# Altium PCB CCS_v3.1.PcbDoc
Units mm, origin at the board's own origin, x right, y up, seen from the top; angles counter-clockwise.
Board outline 55.75 x 70.87 mm, 2 copper layers (Top Layer, Bottom Layer); 34 components, 39 nets, 250 pads, 30 vias.
Unrouted connection lines stored in the file: 1.
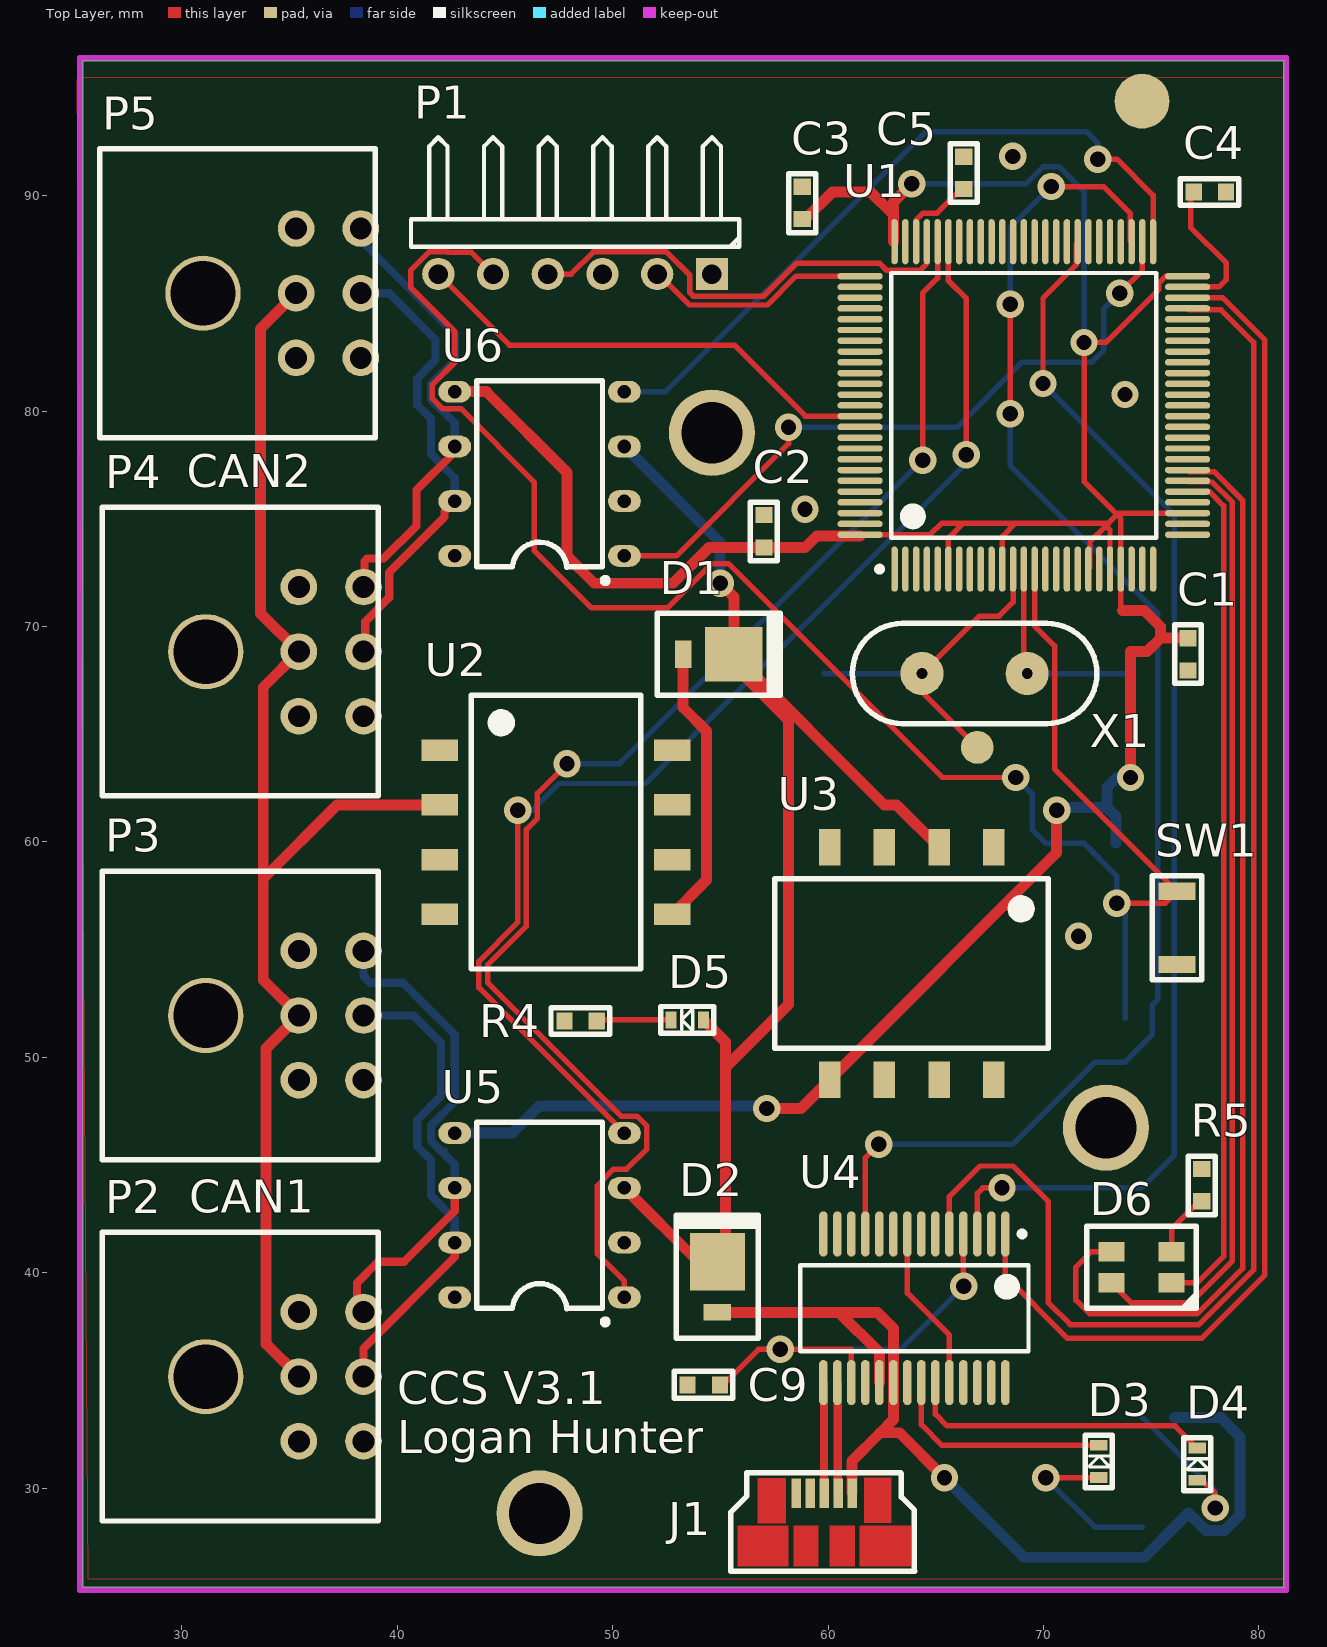
[diagram p0: Top Layer view]
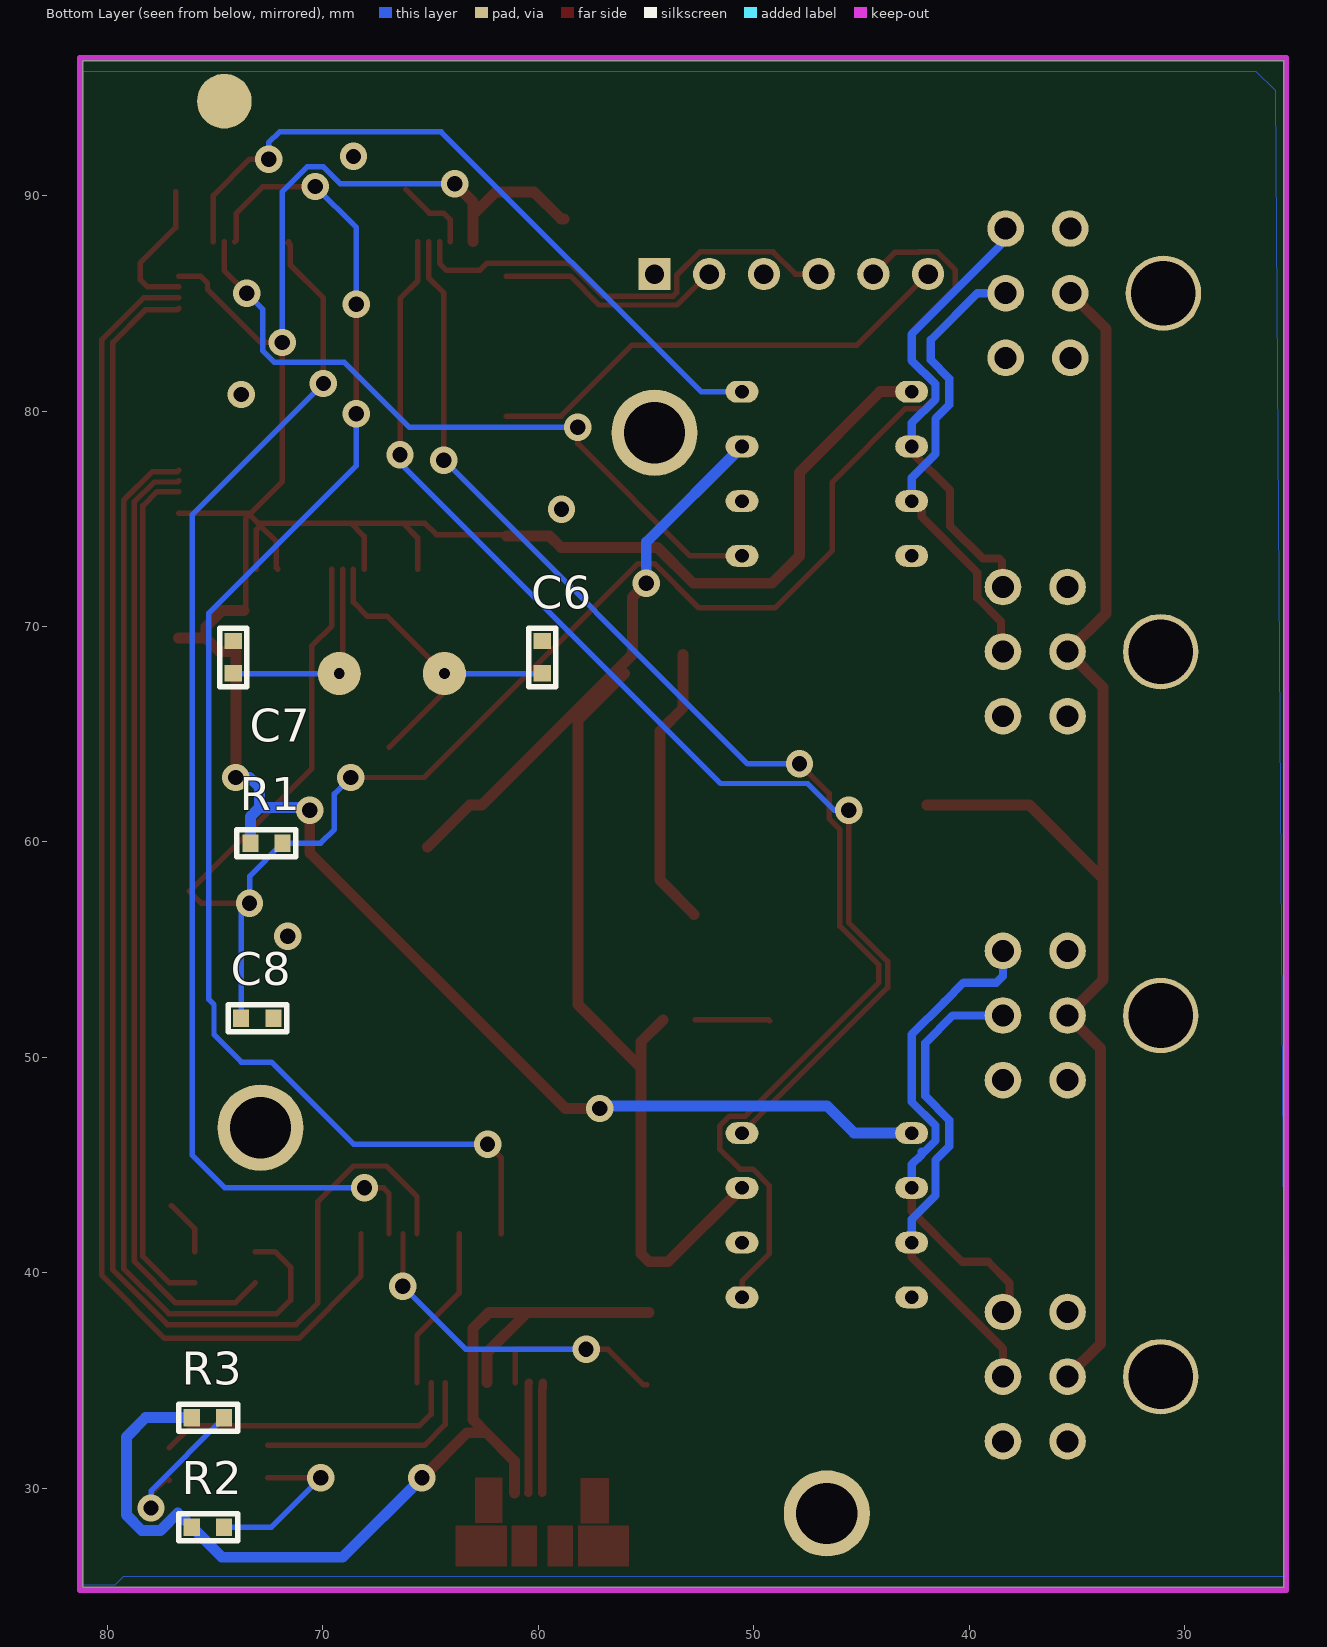
[diagram p1: Bottom Layer view, seen from below]

## Layer stack, top to bottom
Top Solder: solder mask 0.0102, Solder Resist, Dk 3.5
Top Layer: signal copper 0.0356
Dielectric 1: dielectric 0.32, FR-4, Dk 4.8
Bottom Layer: signal copper 0.0356
Bottom Solder: solder mask 0.0102, Solder Resist, Dk 3.5

## Board outline
25.4,25.4 81.153,25.4 81.153,96.266 25.4,96.266

## Design rules (kind name [scope] priority, off if disabled: settings)
BoardOutlineClearance [All] p1: gap=0.381
Clearance [All] p1: gap=0.152
DiffPairsRouting [All] p1: maxlimit=0.254 minlimit=0.254 mostfreqgap=0.254 toplayer_minwidth=0.381 toplayer_maxwidth=0.381 toplayer_prefwidth=0.381 bottomlayer_minwidth=0.381 bottomlayer_maxwidth=0.381 bottomlayer_prefwidth=0.381 maxuncoupledlength=12.7
HoleSize [All] p1: absolutevalues=TRUE maxlimit=2.54 minlimit=0.33 maxpercent=80.000 minpercent=20.000
MinimumAnnularRing [All] p1: minimumring=0.178
PolygonConnect [All] p1: connectstyle=Relief reliefconductorwidth=0.254 reliefentries=4 polygonreliefangle="90 Angle" airgapwidth=0.254
RoutingVias [All] p1: holewidth=0.711 width=1.27 viastyle="Through Hole" minholewidth=0.711 minwidth=1.27 maxholewidth=0.711 maxwidth=1.27
SolderMaskExpansion [All] p1: expansion=0.102
Width [All] p1: maxlimit=0.762 minlimit=0.152 preferedwidth=0.254
28 further rules are at their usual default settings.

## Classes and differential pairs
component class Communications: C9 D3 D4 R2 R3 U4 U5 U6
component class Conectors: J1 P1 P2 P3 P4 P5
component class MCU: C4 C5 C6 C7 C8 D6 R1 R5 SW1 U1 X1
component class Power: C1 C2 C3 D1 D2 D5 R4 U2 U3
differential pair CAN1: +CAN1_P -CAN1_N
differential pair CAN2: +CAN2_P -CAN2_N
differential pair USBD: +USBD_P -USBD_N

## Components (designator, comment, footprint, x,y, rotation, side; value= is the part's Value field where it differs from the comment)
C1 "SCH_GENERIC_CAPACITOR_0603" PCB_GENERIC_SMD_0603 76.708,68.707 r90 top
C2 "SCH_GENERIC_CAPACITOR_0603" PCB_GENERIC_SMD_0603 57.023,74.422 r270 top
C3 "SCH_GENERIC_CAPACITOR_0603" PCB_GENERIC_SMD_0603 58.801,89.662 r270 top
C4 "SCH_GENERIC_CAPACITOR_0603" PCB_GENERIC_SMD_0603 77.724,90.17 r180 top
C5 "SCH_GENERIC_CAPACITOR_0603" PCB_GENERIC_SMD_0603 66.294,91.059 r270 top
C6 "SCH_GENERIC_CAPACITOR_0603" PCB_GENERIC_SMD_0603 59.817,68.58 r270 bottom
C7 "SCH_GENERIC_CAPACITOR_0603" PCB_GENERIC_SMD_0603 74.168,68.58 r270 bottom
C8 "SCH_GENERIC_CAPACITOR_0603" PCB_GENERIC_SMD_0603 73.05,51.816 r180 bottom
C9 "SCH_GENERIC_CAPACITOR_0603" PCB_GENERIC_SMD_0603 54.229,34.798 r180 top
D1 "Schottky Diode" "ON Semi Schottky Diode - MBRM110LT1G" 53.975,68.707 r180 top
D2 "Schottky Diode" "ON Semi Schottky Diode - MBRM110LT1G" 54.864,38.862 r270 top
D3 "Green LED" SMD_0603_LED 72.517,31.242 r90 top
D4 "Blue LED" SMD_0603_LED 77.089,31.115 r90 top
D5 "Red LED" SMD_0603_LED 53.467,51.689 r180 top
D6 "TriColourLED" "TricolourLED - SunLED - DK  1497-1225-2-ND" 74.549,40.259 r0 top
J1 "Molex MicroUSB" "Molex MircoUSB - 0473460001" 59.817,29.083 r90 top
P1 "Debug" HDR1X6H 54.61,86.36 r180 top
P2 "CAN1" PCB_MLX_MICROFIT_3X2 31.115,35.179 r270 top
P3 "CAN1 TERM" PCB_MLX_MICROFIT_3X2 31.115,51.943 r270 top
P4 "CAN2" PCB_MLX_MICROFIT_3X2 31.115,68.834 r270 top
P5 "CAN2 TERM" PCB_MLX_MICROFIT_3X2 30.988,85.471 r270 top
R1 "SCH_GENERIC_RESISTOR_0603" PCB_GENERIC_SMD_0603 72.619,59.944 r0 bottom
R2 "SCH_GENERIC_RESISTOR_0603" PCB_GENERIC_SMD_0603 75.336,28.194 r180 bottom
R3 "SCH_GENERIC_RESISTOR_0603" PCB_GENERIC_SMD_0603 75.336,33.274 r180 bottom
R4 "SCH_GENERIC_RESISTOR_0603" PCB_GENERIC_SMD_0603 48.514,51.689 r180 top
R5 "SCH_GENERIC_RESISTOR_0603" PCB_GENERIC_SMD_0603 77.343,44.069 r270 top
SW1 "Reset Switch" "Push Button Switch" 76.2,56.007 r270 top
U1 "STM32F407VGT6" STM-LQFP100_M 69.088,80.264 r90 top
U2 "Delta SA01S DC/DC 12 to 5" 100milPitchSMD8PinPackage 47.371,60.452 r270 top
U3 "Delta SA01S DC/DC 5 to 3.3" 100milPitchSMD8PinPackage 63.881,54.356 r180 top
U4 "IC_FT232RL" SSOP-28 64.008,38.354 r270 top
U5 "MCP2562" MCP2562 46.609,42.672 r180 top
U6 "MCP2562" MCP2562 46.609,77.089 r180 top
X1 "XTAL" CRYSTAL_8MHZ 66.802,67.818 r0 top

## Footprints (in the part's own frame and the unit in brackets; to place one, negate y for a bottom-side part, rotate by r counter-clockwise, add the part's x,y. Pads: shape width x height; smd on the part's side, far side on the other; paste and mask are expansions set on the pad)
100milPitchSMD8PinPackage [mm]
  rect 1x1.7 smd: 1(-3.81,-5.4) 2(-1.27,-5.4) 3(1.27,-5.4) 4(3.81,-5.4) 5(3.81,5.4) 6(1.27,5.4) 7(-1.27,5.4) 8(-3.81,5.4)
  silkscreen extent -6.35,-3.94 6.35,3.94, body extent -6.22,-3.81 6.22,3.81, height 7.11
CRYSTAL_8MHZ [mm] "631-1100-ND"
  round 2 hole 0.5: 1(-2.44,0) 2(2.44,0)
  silkscreen extent -5.68,-2.32 5.68,2.32, body extent -5.59,-1.85 5.59,1.85, height 3.6
HDR1X6H [mm] "Connector; Header; 6 Position; Right Angle"
  rect 1.5x1.5 hole 0.9: 1(0,0)
  round 1.5 hole 0.9: 2(2.54,0) 3(5.08,0) 4(7.62,0) 5(10.16,0) 6(12.7,0)
  silkscreen extent -1.27,-6.35 13.97,-1.27
MCP2562 [mil]
  oval 60x40 hole 25: 1(-155,150) 2(-155,50) 3(-155,-50) 4(-155,-150) 5(155,-150) 6(155,-50) 7(155,50) 8(155,150)
  silkscreen extent -125,-170 115,200, body extent -115,-170 115,170, height 210
"Molex MircoUSB - 0473460001" [mm]
  rect 1.38x0.45 smd: 1(0.69,-1.3) 2(0.69,-0.65) 3(0.69,0) 4(0.69,0.65) 5(0.69,1.3)
  Top Layer region: -2.72,0.25 -0.82,0.25 -0.82,1.425 -2.72,1.425
  Top Layer region: -2.72,1.65 -0.82,1.65 -0.82,4.025 -2.72,4.025
  Top Layer region: -0.711,1.779 1.389,1.779 1.389,3.101 -0.711,3.101
  Top Layer region: -0.686,-3.125 1.414,-3.125 1.414,-1.854 -0.686,-1.854
  Top Layer region: -2.72,-4.025 -0.82,-4.025 -0.82,-1.65 -2.72,-1.65
  Top Layer region: -2.72,-1.425 -0.82,-1.425 -0.82,-0.25 -2.72,-0.25
  silkscreen extent -2.95,-4.22 1.63,4.34, body extent -4.1,-3.96 1.33,4.02, height 2.72
"ON Semi Schottky Diode - MBRM110LT1G" [mil]
  rect 105x100 smd: 1(-65,0)
  rect 30x50 smd: 2(27.5,0)
  silkscreen extent -150,-75 75,75, body extent -115,-65 0,65, height 40
PCB_GENERIC_SMD_0603 [mm]
  rect 0.75x0.8 smd: 1(-0.75,0) 2(0.75,0)
  silkscreen extent -1.35,-0.63 1.38,0.63, body extent -0.75,-0.5 0.75,0.5, height 0.45
PCB_MLX_MICROFIT_3X2 [mm]
  round 1.7 hole 1.02: 1(3,4.32) 2(0,4.32) 3(-3,4.32) 4(3,7.32) 5(0,7.32) 6(-3,7.32)
  round 3.5 hole 3: ""(0,0)
  silkscreen extent -6.7,-4.8 6.7,8, body extent -6.57,-4.65 6.58,7.59, height 8.83
"Push Button Switch" [mm]
  rect 0.8x1.7 smd: 1(-1.7,0) 2(1.7,0)
  silkscreen extent -2.41,-1.14 2.41,1.14, body extent -2.16,-0.89 2.16,0.89, height 1.6
SMD_0603_LED [mm]
  rect 0.5x0.8 smd: 1(-0.747,-0.047) 2(0.753,-0.047)
  silkscreen extent -1.22,-0.67 1.23,0.58, body extent -0.75,-0.55 0.75,0.45, height 0.45
SSOP-28 [mm] "28-Pin SSOP 0.65 mm Pitch"
  oval 2.1x0.4 smd: 1(-3.45,4.225) 2(-3.45,3.575) 3(-3.45,2.925) 4(-3.45,2.275) 5(-3.45,1.625) 6(-3.45,0.975) 7(-3.45,0.325) 8(-3.45,-0.325) 9(-3.45,-0.975) 10(-3.45,-1.625) 11(-3.45,-2.275) 12(-3.45,-2.925) 13(-3.45,-3.575) 14(-3.45,-4.225) 15(3.45,-4.225) 16(3.45,-3.575) 17(3.45,-2.925) 18(3.45,-2.275) 19(3.45,-1.625) 20(3.45,-0.975) 21(3.45,-0.325) 22(3.45,0.325) 23(3.45,0.975) 24(3.45,1.625) 25(3.45,2.275) 26(3.45,2.925) 27(3.45,3.575) 28(3.45,4.225)
  silkscreen extent -3.57,-5.3 2,5.3, body extent -2.7,-5.3 2.7,5.3, height 2
STM-LQFP100_M [mm] "Thin QFP, 100-Leads, Body 14x14mm, Pitch 0.5mm, IPC Low Density"
  oval 2.1x0.3 smd: 1(-7.6,6) 2(-7.6,5.5) 3(-7.6,5) 4(-7.6,4.5) 5(-7.6,4) 6(-7.6,3.5) 7(-7.6,3) 8(-7.6,2.5) 9(-7.6,2) 10(-7.6,1.5) 11(-7.6,1) 12(-7.6,0.5) 13(-7.6,0) 14(-7.6,-0.5) 15(-7.6,-1) 16(-7.6,-1.5) 17(-7.6,-2) 18(-7.6,-2.5) 19(-7.6,-3) 20(-7.6,-3.5) 21(-7.6,-4) 22(-7.6,-4.5) 23(-7.6,-5) 24(-7.6,-5.5) 25(-7.6,-6) 51(7.6,-6) 52(7.6,-5.5) 53(7.6,-5) 54(7.6,-4.5) 55(7.6,-4) 56(7.6,-3.5) 57(7.6,-3) 58(7.6,-2.5) 59(7.6,-2) 60(7.6,-1.5) 61(7.6,-1) 62(7.6,-0.5) 63(7.6,0) 64(7.6,0.5) 65(7.6,1) 66(7.6,1.5) 67(7.6,2) 68(7.6,2.5) 69(7.6,3) 70(7.6,3.5) 71(7.6,4) 72(7.6,4.5) 73(7.6,5) 74(7.6,5.5) 75(7.6,6)
  oval 0.3x2.1 smd: 26(-6,-7.6) 27(-5.5,-7.6) 28(-5,-7.6) 29(-4.5,-7.6) 30(-4,-7.6) 31(-3.5,-7.6) 32(-3,-7.6) 33(-2.5,-7.6) 34(-2,-7.6) 35(-1.5,-7.6) 36(-1,-7.6) 37(-0.5,-7.6) 38(0,-7.6) 39(0.5,-7.6) 40(1,-7.6) 41(1.5,-7.6) 42(2,-7.6) 43(2.5,-7.6) 44(3,-7.6) 45(3.5,-7.6) 46(4,-7.6) 47(4.5,-7.6) 48(5,-7.6) 49(5.5,-7.6) 50(6,-7.6) 76(6,7.6) 77(5.5,7.6) 78(5,7.6) 79(4.5,7.6) 80(4,7.6) 81(3.5,7.6) 82(3,7.6) 83(2.5,7.6) 84(2,7.6) 85(1.5,7.6) 86(1,7.6) 87(0.5,7.6) 88(0,7.6) 89(-0.5,7.6) 90(-1,7.6) 91(-1.5,7.6) 92(-2,7.6) 93(-2.5,7.6) 94(-3,7.6) 95(-3.5,7.6) 96(-4,7.6) 97(-4.5,7.6) 98(-5,7.6) 99(-5.5,7.6) 100(-6,7.6)
  silkscreen extent -7.72,-6.15 6.15,6.82, body extent -7,-7 7,7, height 1.6
"TricolourLED - SunLED - DK  1497-1225-2-ND" [mm]
  rect 1.2x0.9 smd: 1(1.4,-0.725) 2(-1.4,-0.725) 3(-1.4,0.725) 4(1.4,0.725)
  silkscreen extent -2.54,-1.91 2.54,1.91, body extent -1.84,-1.52 1.84,1.52, height 1.9

## Part data
C1 C2 C3 C4 C5 C6 C7 C8 C9: "Generic SMD capacitor 0603"
D1 D2: library part "ON Semi Schottky Diode - MBRM110LT1G"
D3 D4 D5: library part SMD_0603_LED
J1: library part "Molex MicroUSB -  0473460001"
P1: library part "Header 6H", "Header, 6-Pin, Right Angle"
P2 P3 P4 P5: library part SCH_MLX_MICROFIT_3X2
R1 R2 R3 R4 R5: "Generic SMD resistor 0603"
SW1: library part PushButtonSwitch
U1: "ARM Cortex-M4 32-bit MCU+FPU, 210 DMIPS, 1024 kB Flash, 192 kB Internal RAM, 82 I/Os, 100-pin LQFP, -40 to 85 degC, Tray"
U2 U3: library part "Delta SA01S DC/DC"
U4: "FT232R USB UART"
X1: library part Crystal

## Free pads (board coordinates)
  round 4 hole 2.845: ""(46.609,28.829) ""(54.61,78.994) ""(72.898,46.736)
  round 1.524 smd: ""(66.929,64.389)
  round 2.54 all layers, no hole: ""(74.574,94.386)

## Via types
v1: diameter 1.27, hole 0.711, Top Layer to Bottom Layer, 30 vias

## Nets (pads, with @x,y where several pads share a name; then routed paths per layer and width w, separated by ;. In a path a pad name is that pad's centre, name@x,y a point inside that pad or via, vN(x,y) a via of type N, cw(c..) or ccw(c..) an arc to the next point about the centre after c; other vN are vias at no path point)
3.3V: C1.2 C2.2 C3.2 R1.2 U1.6 U1.11 U1.19 U1.21 U1.22 U1.28 U1.50 U1.75 U1.100 U3.5 U5.5 U6.5 | length 146.9
  Top Layer w0.254: U1.100@61.691,74.264 64.739,74.264 65.278,74.803 66.294,74.803 ; U1.6 65.588,74.097 66.294,74.803 ; U1.11 68.088,74.184 68.707,74.803 ; U1.19 72.159,72.735 72.159,73.937 72.898,74.676 ; U1.21 73.088,74.486 72.898,74.676 ; 73.66,70.739 73.588,70.811 U1.22 73.588,75.021 71.882,76.727 v1(71.882,83.185) 72.898,83.185 75.359,85.646 75.359,85.942 75.681,86.264 U1.50 ; U1.28 73.486,75.264 73.025,74.803 ; 66.294,74.803 68.707,74.803 ; 68.707,74.803 73.025,74.803 ; 72.898,74.676 73.025,74.803
  Top Layer w0.508: U6.5 44.136,80.899 47.879,77.156 47.879,73.279 49.149,72.009 52.808,72.009 54.471,73.672 C2.2 58.94,73.672 59.476,74.208 U1.100@61.488,74.208 ; v1(57.15,47.625) 58.74,47.625 U3.5 70.612,59.497 v1(70.612,61.468) ; C3.2 58.94,88.912 60.198,90.17 61.976,90.17 63.032,89.114 ; U1.75@63.032,87.864 63.032,89.114 ; v1(63.881,90.551) 63.032,89.702 63.032,89.114 ; 73.66,70.739 74.676,70.739 75.426,69.989 75.426,69.457 ; v1(74.041,62.992) 74.041,68.834 74.803,68.834 75.426,69.457 ; C1.2 75.426,69.457
  Bottom Layer w0.254: v1(63.881,90.551) 69.192,90.551 69.979,91.338 70.737,91.338 71.882,90.193 v1(71.882,83.185)
  Bottom Layer w0.508: U5.5 45.339,46.482 46.609,47.752 57.023,47.752 v1(57.15,47.625) ; v1@70.866,61.595 72.951,61.595 ; R1.2 73.369,61.177 72.951,61.595 ; v1(74.041,62.992) 73.406,62.992 72.951,62.537 72.951,61.595
5V: D1.1 D2.1 D5.1 U3.2 U5.3 U6.3 | length 62.9
  Top Layer w0.508: U5.3 53.975,40.513 D2.1 55.245,40.894 55.245,49.53 ; D5.1 55.245,50.705 55.245,49.53 ; v1(54.991,72.009) 55.626,71.374 D1.1 62.611,61.722 63.185,61.722 U3.2 ; D1.1@56.007,67.818 58.166,65.659 58.166,52.451 55.245,49.53
  Bottom Layer w0.508: U6.3 54.991,73.914 v1(54.991,72.009)
"5V - DCDC": D1.2 U2.5 | length 13.2
  Top Layer w0.508: U2.5 54.356,58.227 54.356,65.151 53.276,66.23 D1.2
"5V - USB": D2.2 J1.1 R2.1 R3.1 U4.19 U4.20 | length 48.6
  Top Layer w0.508: D2.2 60.515,38.163 ; J1.1 61.117,31.272 62.42,32.575 ; U4.19 62.383,36.296 60.515,38.163 ; v1(65.405,30.48) 63.309,32.575 62.42,32.575 ; 60.515,38.163 62.293,38.163 63.033,37.424 U4.20 63.033,33.188 62.42,32.575
  Bottom Layer w0.508: v1(65.405,30.48) 69.088,26.797 74.689,26.797 R2.1 76.74,28.848 77.547,28.042 78.409,28.042 79.121,28.753 79.121,32.385 78.232,33.274 R3.1
12V: P2.2 P3.2 P4.2 P5.2 U2.2 | length 64
  Top Layer w0.508: P5.2 33.657,83.82 33.657,70.612 P4.2 33.782,67.181 33.782,58.293 ; P2.2 33.909,36.705 33.909,50.417 P3.2 33.782,53.596 33.782,58.293 ; U2.2 37.211,61.722 33.782,58.293
BLUE_LED: D6.3 U1.32 | length 51.2
  Top Layer w0.254: D6.3 72.226,40.984 71.501,40.259 71.501,38.735 72.136,38.1 77.149,38.1 79.248,40.199 79.248,75.861 77.915,77.193 76.759,77.193 U1.32
CAN1_N: P2.6 P3.6 U5.6 | length 22.7
  Top Layer w0.381: P2.6@38.133,38.768 38.133,39.53 39.116,40.513 40.326,40.513 42.672,42.859 U5.6 ; P2.6 P2.6@38.435,38.435
  Bottom Layer w0.381: P3.6 38.435,53.767 38.735,53.467 40.259,53.467 41.148,52.578 41.157,52.578 42.672,51.063 42.672,47.939 41.567,46.834 41.567,46.13 42.066,45.631 42.202,45.631 42.202,45.495 42.672,45.025 U5.6
CAN1_P: P2.5 P3.5 U5.7 | length 22.7
  Top Layer w0.381: P2.5 38.435,36.492 42.672,40.729 U5.7
  Bottom Layer w0.381: P3.5@38.54,52.048 P3.5 40.767,51.943 42.037,50.673 42.037,48.202 40.932,47.097 40.932,45.867 41.567,45.232 41.567,43.59 42.672,42.485 U5.7
CAN1_RX: U1.70 U5.4 | length 56.7
  Top Layer w0.254: v1(45.593,61.468) 45.593,56.261 43.79,54.458 43.79,53.238 U5.4 ; U1.70 65.588,86.05 66.421,85.217 v1(66.421,77.978)
  Bottom Layer w0.254: v1(45.593,61.468) 46.256,61.468 47.5,62.713 51.537,62.713 66.421,77.597 v1(66.421,77.978)
CAN1_TX: U1.71 U5.1 | length 64.7
  Top Layer w0.254: v1@47.879,63.881 v1(47.879,63.627) 46.507,62.255 46.507,61.089 45.999,60.581 45.999,56.093 44.196,54.289 44.196,53.467 50.394,47.269 51.126,47.269 51.587,46.808 51.587,45.745 50.65,44.808 50.044,44.808 49.276,44.04 49.276,40.894 50.546,39.624 U5.1 ; v1(64.389,77.724) 64.389,85.471 65.088,86.17 U1.71
  Bottom Layer w0.254: v1(47.879,63.627) 50.292,63.627 v1(64.389,77.724)
CAN2_N: P4.6 P5.6 U6.6 | length 21.7
  Top Layer w0.381: P4.6 38.481,71.88 38.481,73.025 38.608,73.152 39.37,73.152 40.894,74.676 40.894,76.327 42.672,78.105 U6.6
  Bottom Layer w0.381: P5.6@38.179,88.471 P5.6 38.308,87.93 42.672,83.566 42.672,82.356 41.567,81.251 41.567,80.547 42.672,79.442 U6.6
CAN2_P: P4.5 P5.5 U6.7 | length 21.7
  Top Layer w0.381: P4.5 38.519,68.918 38.519,70.231 39.628,71.34 39.628,72.512 42.202,75.086 42.202,75.349 U6.7
  Bottom Layer w0.381: P5.5 39.624,85.471 41.783,83.312 41.783,82.365 40.932,81.514 40.932,80.284 41.567,79.649 41.567,78.007 42.672,76.902 U6.7
CAN2_RX: U1.51 U6.4 | length 33.4
  Top Layer w0.254: v1(72.517,91.694) 73.406,91.694 75.088,90.012 U1.51
  Bottom Layer w0.254: U6.4 52.451,80.899 64.516,92.964 72.009,92.964 72.517,92.456 v1(72.517,91.694)
CAN2_TX: U1.52 U6.1 | length 32.4
  Top Layer w0.254: U6.1 52.959,73.279 58.166,78.486 v1(58.166,79.248) ; v1(73.533,85.471) 74.588,86.526 U1.52
  Bottom Layer w0.254: v1(58.166,79.248) 65.989,79.248 69.012,82.271 72.261,82.271 72.796,82.806 72.796,84.734 v1(73.533,85.471)
GND: C1.1 C2.1 C3.1 C4.1 C5.1 C6.1 C7.1 C8.2 C9.2 J1.5 P1.1 P1.3 P2.3 P3.3 P4.3 P5.3 pad.@74.574,94.386 R4.2 R5.1 SW1.2 U1.10 U1.20 U1.27 U1.74 U1.94 U1.99 U2.1 U2.4 U3.1 U3.4 U4.7 U4.18 U4.21 U4.25 U4.26 U5.2 U5.8 U6.2 U6.8
  other v1: 71.628,55.626 58.928,75.438 73.787,80.772 68.58,91.821
GREEN_LED: D6.2 U1.31 | length 44.5
  Top Layer w0.254: D6.2 74.075,38.608 76.835,38.608 78.765,40.538 78.765,75.769 77.826,76.708 76.744,76.708 U1.31
NC: U4.8 U4.24 | length 7.7
  Top Layer w0.254: U4.8 63.683,39.06 65.633,37.11 U4.24
NetC4_2: C4.2 U1.49 | length 6.7
  Top Layer w0.254: U1.49 78.144,85.764 78.486,86.106 78.486,86.868 76.835,88.519 C4.2@76.835,90.182
NetC5_2: C5.2 U1.73 | length 3.7
  Top Layer w0.254: U1.73 64.088,88.871 64.41,89.193 65.063,89.193 C5.2@66.155,90.285
NetC7_2: C7.2 U1.13 X1.2 | length 9.8
  Top Layer w0.254: U1.13 69.088,67.972 X1.2
  Bottom Layer w0.254: X1.2 74.156,67.818 C7.2
NetC9_1: C9.1 U4.4 U4.17 | length 20.5
  Top Layer w0.254: C9.1 55.118,34.798 56.765,36.445 v1(57.785,36.445) 61.083,36.445 U4.17 ; U4.4 66.283,39.381 v1(66.294,39.37)
  Bottom Layer w0.254: v1(57.785,36.445) 63.369,36.445 v1(66.294,39.37)
NetD3_1: D3.1 R2.2 | length 7.9
  Top Layer w0.254: v1(70.104,30.48) 70.119,30.495 D3.1
  Bottom Layer w0.254: v1(70.104,30.48) 72.39,28.194 R2.2
NetD3_2: D3.2 U4.22 | length 10.6
  Top Layer w0.254: U4.22 64.333,32.949 65.287,31.995 D3.2
NetD4_1: D4.1 R3.2 | length 7.5
  Top Layer w0.254: D4.1 77.248,30.48 77.978,29.75 v1(77.978,29.083)
  Bottom Layer w0.254: R3.2 77.978,29.882 v1(77.978,29.083)
NetD4_2: D4.2 U4.23 | length 14.3
  Top Layer w0.254: U4.23 64.983,33.442 65.532,32.893 76.111,32.893 D4.2
NetD5_2: D5.2 R4.1 | length 3.5
  Top Layer w0.254: R4.1 49.311,51.736 D5.2
NetD6_4: D6.4 R5.2 | length 2.6
  Top Layer w0.254: D6.4 75.949,42.04 R5.2@77.031,43.122
NRST: C8.1 P1.5 R1.1 SW1.1 U1.14 | length 84.8
  Top Layer w0.254: P1.5 43.434,87.376 42.35,87.376 42.336,87.389 41.484,87.389 40.64,86.546 40.64,85.725 42.672,83.693 42.672,82.267 41.631,81.225 41.631,80.573 42.092,80.112 42.951,80.112 46.355,76.708 46.355,73.533 49.022,70.866 52.555,70.866 54.612,72.923 55.37,72.923 65.301,62.992 v1(68.707,62.992) ; U1.14 69.588,70.031 70.521,69.097 70.521,63.386 SW1.1 75.643,57.15 v1(73.406,57.15)
  Bottom Layer w0.254: v1(68.707,62.992) 69.469,62.23 69.469,60.579 70.104,59.944 R1.1 73.406,58.407 v1(73.406,57.15) 73.8,56.756 C8.1
RED_LED: D6.1 U1.30 | length 39.7
  Top Layer w0.254: D6.1 77.126,39.534 78.359,40.767 78.359,75.6 77.695,76.264 U1.30
SCLK: C6.2 pad.@66.929,64.389 U1.12 X1.1 | length 16.2
  Top Layer w0.254: pad.@66.929,64.389 64.362,66.956 X1.1 67.029,70.485 67.945,70.485 68.588,71.128 U1.12
  Bottom Layer w0.254: C6.2 59.829,67.818 X1.1
SWCLK: P1.2 U1.76 | length 10.1
  Top Layer w0.254: P1.2@52.451,86.049 53.576,84.924 57.178,84.924 58.518,86.264 U1.76
SWDIO: P1.4 U1.72 | length 21.3
  Top Layer w0.254: P1.4 48.074,86.36 49.104,87.389 52.496,87.389 53.581,86.305 53.581,85.494 53.744,85.331 57.01,85.331 58.547,86.868 62.391,86.868 62.725,86.535 64.266,86.535 64.588,86.857 U1.72
SWO: P1.6 U1.89 | length 22.3
  Top Layer w0.254: P1.6 45.212,83.058 55.649,83.058 58.943,79.764 U1.89
UART3_CTS: U1.58 U4.3 | length 57.4
  Top Layer w0.254: U4.3 66.933,43.692 67.183,43.942 v1(68.072,43.942) ; v1(69.977,81.28) 69.977,85.246 71.517,86.786 71.517,87.713 71.628,87.824 U1.58
  Bottom Layer w0.254: v1(68.072,43.942) 74.549,43.942 76.073,45.466 76.073,75.184 v1(69.977,81.28)
UART3_RTS: U1.53 U4.11 | length 67.9
  Top Layer w0.254: U4.11 61.733,45.35 v1(62.357,45.974) ; v1(68.453,79.883) v1(68.453,84.963) ; v1(70.358,90.424) 72.787,90.424 74.017,89.193 74.017,87.935 U1.53
  Bottom Layer w0.254: v1(62.357,45.974) 68.58,45.974 72.39,49.784 73.787,49.784 75.057,51.054 75.057,52.451 75.311,52.705 75.311,70.612 68.453,77.47 v1(68.453,79.883) ; v1(68.453,84.963) 68.453,88.519 v1(70.358,90.424)
UART3_RX: U1.48 U4.1 | length 64.2
  Top Layer w0.254: U4.1 68.233,39.844 71.12,36.957 77.343,36.957 80.264,39.878 80.264,83.312 78.312,85.264 U1.48
UART3_TX: U1.47 U4.5 | length 70.1
  Top Layer w0.254: U4.5 65.633,43.535 67.056,44.958 68.58,44.958 70.231,43.307 70.231,38.608 71.247,37.592 77.216,37.592 79.756,40.132 79.756,83.185 78.248,84.693 76.759,84.693 U1.47
USBD_N: J1.2 U4.16 | length 5.1
  Top Layer w0.381: U4.16 60.452,34.885 60.452,29.788 J1.2
USBD_P: J1.3 U4.15 | length 5.1
  Top Layer w0.381: U4.15 59.798,34.889 59.798,34.641 59.817,34.622 J1.3
pads on no net: J1.4 P2. P2.1 P2.4 P3. P3.1 P3.4 P4. P4.1 P4.4 P5. P5.1 P5.4 U1.1 U1.2 U1.3 U1.4 U1.5 U1.7 U1.8 U1.9 U1.15 U1.16 U1.17 U1.18 U1.23 U1.24 U1.25 U1.26 U1.29 U1.33 U1.34 U1.35 U1.36 U1.37 U1.38 U1.39 U1.40 U1.41 U1.42 U1.43 U1.44 U1.45 U1.46 U1.54 U1.55 U1.56 U1.57 U1.59 U1.60 U1.61 U1.62 U1.63 U1.64 U1.65 U1.66 U1.67 U1.68 U1.69 U1.77 U1.78 U1.79 U1.80 U1.81 U1.82 U1.83 U1.84 U1.85 U1.86 U1.87 U1.88 U1.90 U1.91 U1.92 U1.93 U1.95 U1.96 U1.97 U1.98 U2.3 U2.6 U2.7 U2.8 U3.3 U3.6 U3.7 U3.8 U4.2 U4.6 U4.9 U4.10 U4.12 U4.13 U4.14 U4.27 U4.28

## Polygon pours and split planes (outlines as drawn)
GND on Top Layer "GND_Top" (solid, remove dead copper, shelved, pour order 0): 25.146,95.377 25.273,95.504 81.153,95.504 81.153,25.781 79.756,25.781 25.654,25.781
GND on Bottom Layer "GND_Bottom" (solid, remove dead copper, shelved, pour order 2): 25.781,94.869 26.67,95.758 81.153,95.758 81.153,25.527 79.629,25.527 79.248,25.908 25.273,25.908

## Keep-outs
Keep-Out Layer:
  lines w0.254: 25.273,25.273 25.273,96.393 81.28,96.393 81.28,25.273 25.273,25.273

## Silkscreen, mask and mechanical layers (free items; w line width, h text height)
Top Overlay:
  text "CAN2" at 30.226,76.454 h1.52
  text "CAN1" at 30.353,42.799 h1.52
  text "CCS V3.1 / Logan Hunter" at 40.005,31.623 h1.52